# Altium PCB IObuffer.PcbDoc
Units mm, origin at the board's own origin, x right, y up, seen from the top; angles counter-clockwise.
Board outline 36 x 36 mm, 2 copper layers (Top Layer, Bottom Layer), stack 1.58 mm thick; 11 components, 16 nets, 64 pads, 11 vias.
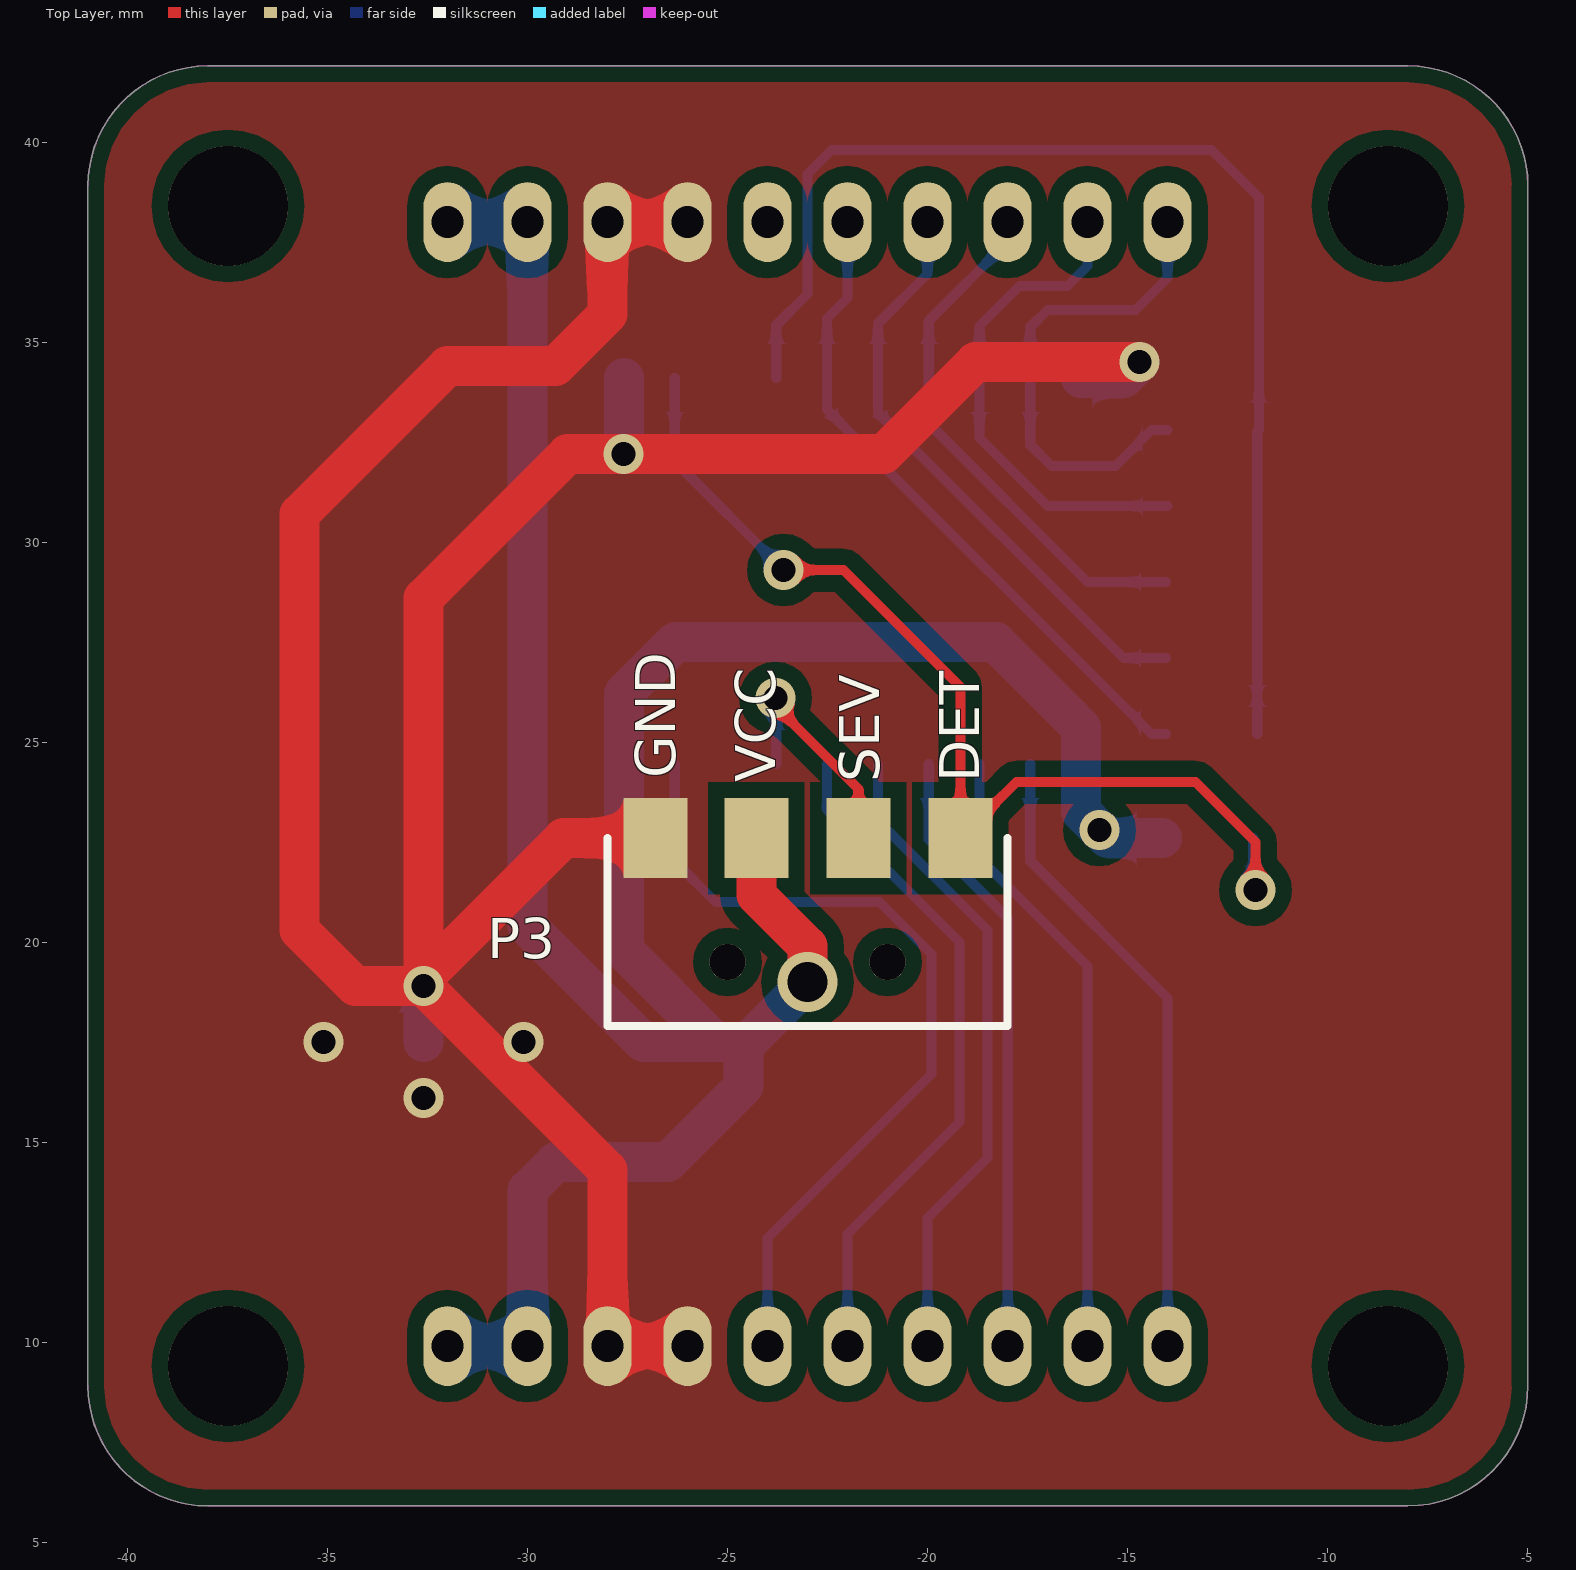
[diagram p0: Top Layer view]
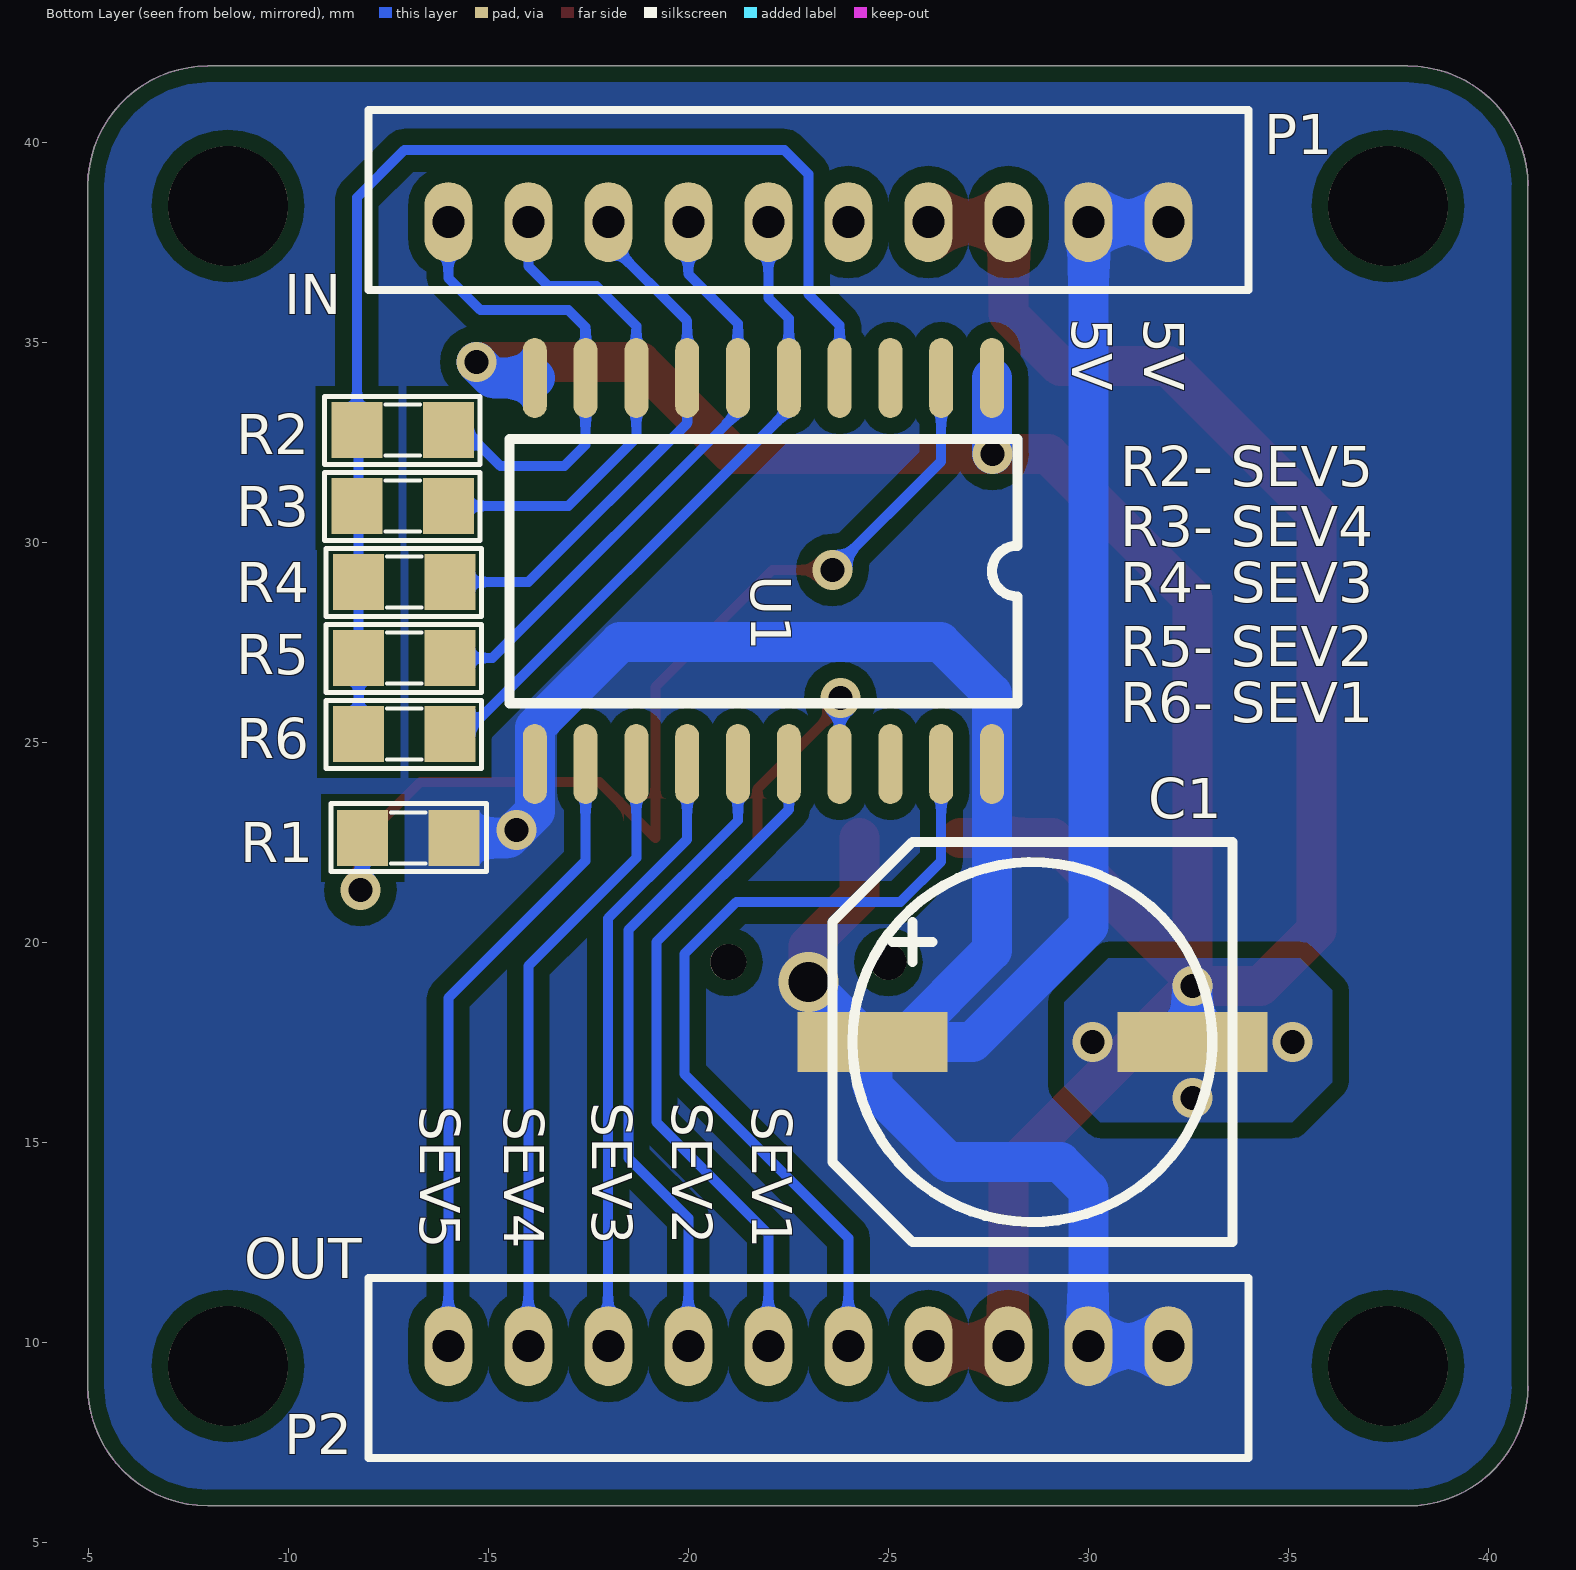
[diagram p1: Bottom Layer view, seen from below]
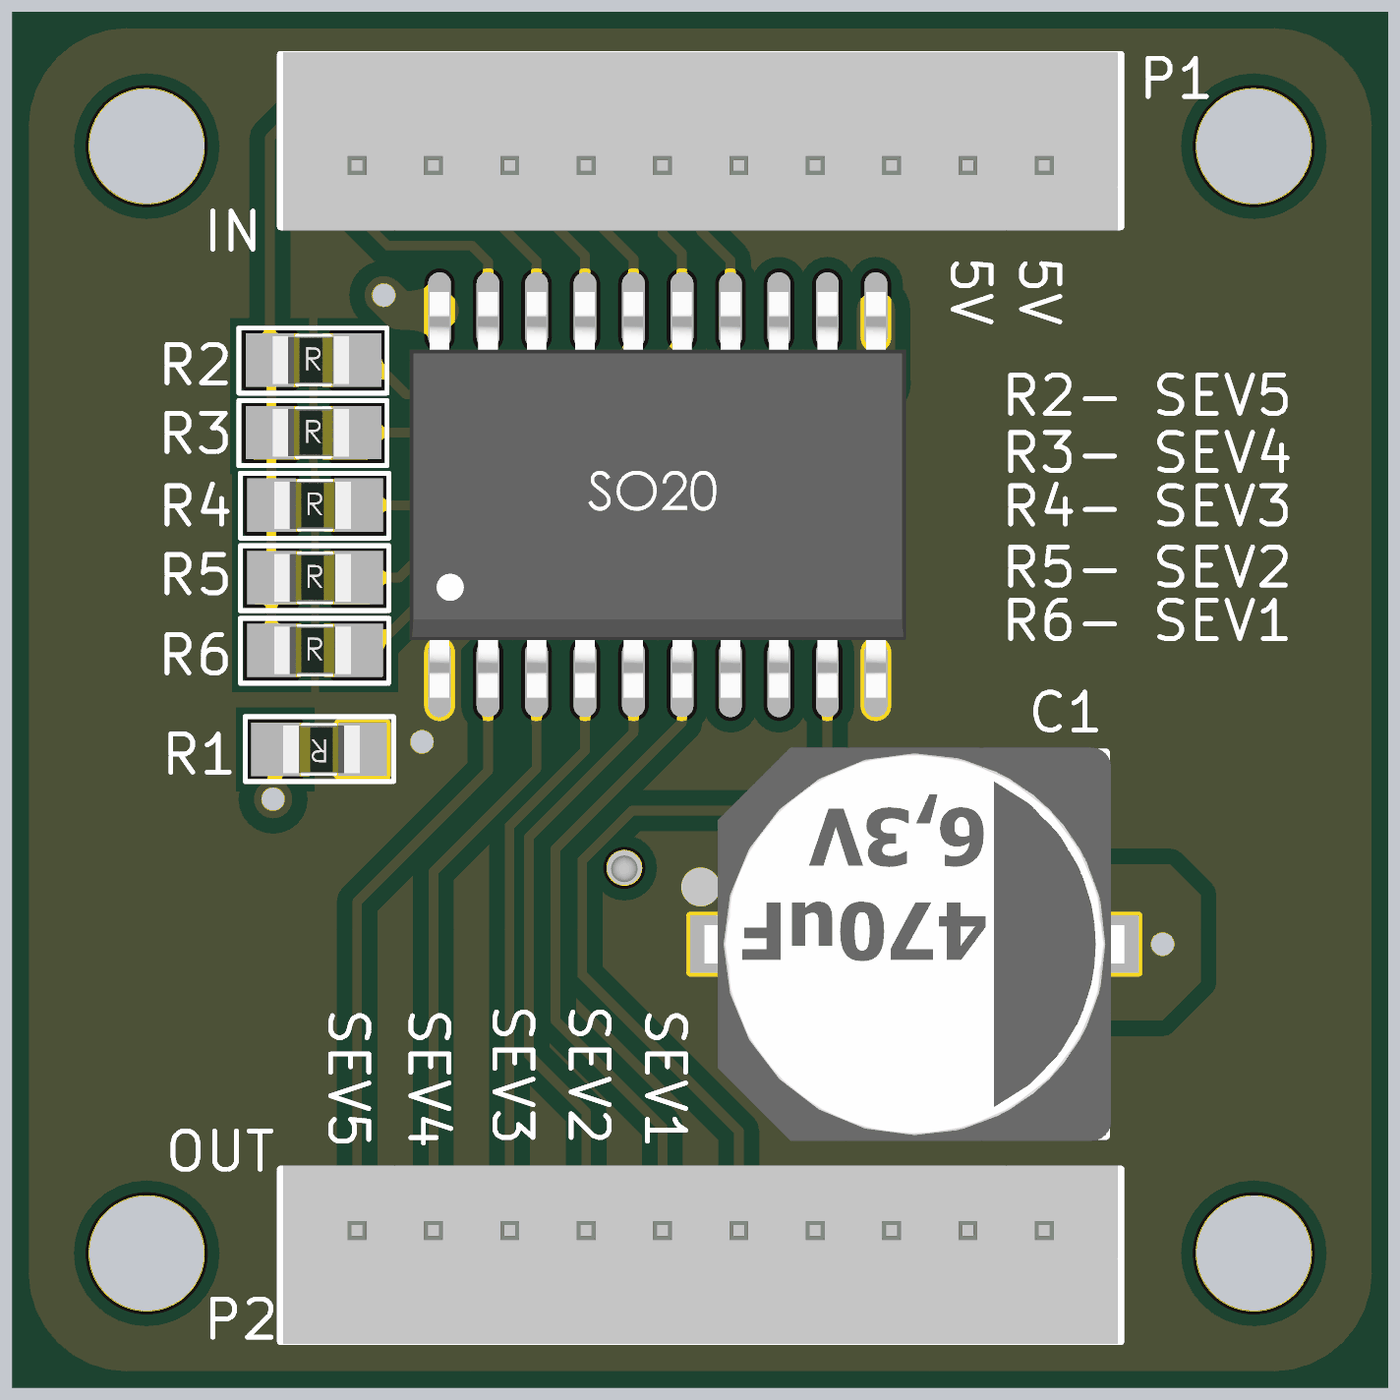
[diagram p2: 3D render of the assembled board from below, using the file's embedded part models]

## Layer stack, top to bottom
Top Solder: solder mask 0.0102, Solder Resist, Dk 3.5
Top Layer: signal copper 0.0356
Dielectric 1: dielectric 1.5086, FR-4, Dk 4.8
Bottom Layer: signal copper 0.0356
Bottom Solder: solder mask 0.0102, Solder Resist, Dk 3.5

## Board outline
-37.989,5.903 cw(c-37.989,8.903) -40.989,8.903 -40.989,38.903 cw(c-37.989,38.903) -37.989,41.903 -7.989,41.903 cw(c-7.989,38.903) -4.989,38.903 -4.989,8.903 cw(c-7.989,8.903) -7.989,5.903

## Design rules (kind name [scope] priority, off if disabled: settings)
Clearance [All] p1: gap=0.254
HoleSize [All] p1: absolutevalues=TRUE maxlimit=5 minlimit=0.01 maxpercent=80.000 minpercent=20.000
MinimumSolderMaskSliver [All] p1: minsoldermaskwidth=0.01
PolygonConnect [All] p1: connectstyle=Direct reliefconductorwidth=0.254 reliefentries=4 polygonreliefangle="90 Angle" airgapwidth=0.254
RoutingVias [All] p1: holewidth=0.3 width=0.6 viastyle="Through Hole" minholewidth=0.3 minwidth=0.6 maxholewidth=5 maxwidth=5
SilkToSilkClearance [All] p1: silktosilkclearance=0.1
SilkToSolderMaskClearance [IsPad] p1: minsilkscreentomaskgap=0.01 clearancetoexposedcopper=TRUE
SolderMaskExpansion [All] p1: expansion=0.102
Width [All] p1: maxlimit=5 minlimit=0.254 preferedwidth=0.254
26 further rules are at their usual default settings.

## Components (designator, comment, footprint, x,y, rotation, side; value= is the part's Value field where it differs from the comment)
C1 "1000uF" TU_NHOM_470uF_25V_MH -28.6,17.5 r270 bottom locked
P1 "IN" JST-PH2.00-10P -14,38 r180 bottom locked
P2 "OUT" JST-PH2.00-10P -32,9.9 r0 bottom locked
P3 "Header 4" SpringCON -23,19.5 r0 top locked
R1 "220" "Tro SMD 0805" -13,22.6 r0 bottom
R2 "0" "Tro SMD 0805" -12.857,32.8 r180 bottom
R3 "0" "Tro SMD 0805" -12.857,30.9 r180 bottom
R4 "0" "Tro SMD 0805" -12.9,29 r180 bottom
R5 "0" "Tro SMD 0805" -12.9,27.1 r180 bottom
R6 "0" "Tro SMD 0805" -12.9,25.2 r180 bottom
U1 "74HC573" SOIC-20 -21.875,29.274 r270 bottom locked

## Footprints (in the part's own frame and the unit in brackets; to place one, negate y for a bottom-side part, rotate by r counter-clockwise, add the part's x,y. Pads: shape width x height; smd on the part's side, far side on the other; paste and mask are expansions set on the pad)
JST-PH2.00-10P [mm]
  oval 1.2x2 hole 0.8 paste+0: 1(0,0) 2(2,0) 3(4,0) 4(6,0) 5(8,0) 6(10,0) 7(12,0) 8(14,0) 9(16,0) 10(18,0)
  silkscreen extent -2,-1.7 20,2.8, body extent -1.93,-1.8 19.93,2.87, height 5.89
SOIC-20 [mm]
  oval 2x0.6 smd: 1(-4.826,5.715) 2(-4.826,4.445) 3(-4.826,3.175) 4(-4.826,1.905) 5(-4.826,0.635) 6(-4.826,-0.635) 7(-4.826,-1.905) 8(-4.826,-3.175) 9(-4.826,-4.445) 10(-4.826,-5.715) 11(4.826,-5.715) 12(4.826,-4.445) 13(4.826,-3.175) 14(4.826,-1.905) 15(4.826,-0.635) 16(4.826,0.635) 17(4.826,1.905) 18(4.826,3.175) 19(4.826,4.445) 20(4.826,5.715)
  silkscreen extent -3.3,-6.35 3.3,6.35, body extent -5.31,-6.5 5.32,6.5, height 2.56
SpringCON [mm]
  rect 1.6x2 smd paste+0: 1(-3.8,3.1) 2(-1.275,3.1) 3(1.275,3.1) 4(3.825,3.1)
  round 0.9 hole 0.9 paste+0: NC(-2,0) NC(2,0)
  silkscreen extent -5,-1.6 5,3.1, body extent -5,-1.63 5,3.37, height 4.31
"Tro SMD 0805" [mil]
  rect 50x55 smd: 1(-45,0) 2(45,0)
  silkscreen extent -77,-34 76,33, body extent -62,-28 56,27, height 21
TU_NHOM_470uF_25V_MH [mm]
  rect 1.5x3.75 smd: 1(0,-4) 2(0,4)
  silkscreen extent -5,-5 5,5, body extent -5.15,-5.5 5.15,5.5, height 7.9

## Part data
C1: library part TU_NHOM_1000uF_16V_MH, "TU_NHOM_1000uF_16V_MH"
P1 P2: library part "Header 10", "Header, 10-Pin"
P3: "Header, 4-Pin"
R1 R2 R3 R4 R5 R6: library part "R nho", "RES, 100, 1%, 0.1 W, 0402"
U1: library part "74HC573 DIP20 IC Flip-Flop_MH", "Octal D-Type Latch with 3-State Output Non-Inverting"

## Free pads (board coordinates)
  round 3 hole 3 paste+0: NC(-37.489,9.403) NC(-37.489,38.403) NC(-8.489,9.403) NC(-8.489,38.403)

## Via types
v1: diameter 1, hole 0.6, Top Layer to Bottom Layer, tented both sides, 10 vias
v2: diameter 1.5, hole 1, Top Layer to Bottom Layer, tented both sides, 1 vias

## Nets (pads, with @x,y where several pads share a name; then routed paths per layer and width w, separated by ;. In a path a pad name is that pad's centre, name@x,y a point inside that pad or via, vN(x,y) a via of type N, cw(c..) or ccw(c..) an arc to the next point about the centre after c; other vN are vias at no path point)
5V: C1.1 P1.9 P1.10 P2.1 P2.2 P3.2 R1.1 U1.11 U1.20 | length 73.6
  Top Layer w1: P3.2 -24.275,21.175 -23,19.9 v2(-23,19)
  Bottom Layer w1: P2.1 P2.2 -30,13.8 -29.3,14.5 -26.5,14.5 -24.6,16.4 C1.1 ; P1.10 P1.9 -30,20.4 -27.1,17.5 C1.1 ; v2(-23,19) -24.5,17.5 C1.1 ; R1.1 -15.5,22.6 v1(-15.7,22.8) -16.16,23.26 U1.11 -16.16,25.36 -16.376,25.576 -16.376,25.585 -18.291,27.5 -26.304,27.5 -27.59,26.214 U1.20 -27.59,19.79 -25.3,17.5 C1.1
DET: P3.4 R1.2 U1.2 | length 26.4
  Top Layer w0.254: v1(-23.6,29.3) -22.1,29.3 -19.175,26.375 P3.4 -17.775,24 -13.3,24 -11.8,22.5 v1(-11.8,21.3)
  Bottom Layer w0.254: U1.2 -26.32,32.02 v1(-23.6,29.3) ; R1.2 -11.857,21.357 v1(-11.8,21.3)
DETS: P2.5 U1.19 | length 21.3
  Bottom Layer w0.254: U1.19 -26.32,22.02 -25.3,21 -21.2,21 -19.9,19.7 -19.9,16.7 -24,12.6 P2.5
GND: C1.2 P1.7 P1.8 P2.3 P2.4 P3.1 U1.1 U1.10 | length 83.3
  Top Layer w1: P3.1 -29.1,22.6 v1@-32.6,19.1 ; P2.4 P2.3 -28,14.3 v1(-32.6,18.9) ; P1.7 P1.8 -28,35.7 -29.3,34.4 -32,34.4 -35.7,30.7 -35.7,20.3 -34.3,18.9 v1(-32.6,18.9) ; v1(-14.7,34.5) -18.8,34.5 -21.1,32.2 v1(-27.6,32.2) -29,32.2 -32.6,28.6 v1@-32.6,19.1 ; v1(-32.6,18.9) v1@-32.6,19.1
  Bottom Layer w1: C1.2 v1(-32.6,18.9) ; v1(-27.6,32.2) -27.59,32.21 U1.1 ; U1.10 -15.1,34.1 v1(-14.7,34.5)
  other v1: -32.6,16.1 -35.1,17.5 -30.1,17.5
SER1: P2.6 U1.16 | length 17.1
  Bottom Layer w0.254: U1.16 -22.51,23.31 -19.2,20 -19.2,15.5 -22,12.7 P2.6
SER2: P2.7 U1.15 | length 16.3
  Bottom Layer w0.254: U1.15 -21.24,23.04 -18.5,20.3 -18.5,14.6 -20,13.1 P2.7
SER3: P2.8 U1.14 | length 15.4
  Bottom Layer w0.254: U1.14 -19.97,22.57 -17.992,20.592 -17.992,9.908 P2.8
SER4: P2.9 U1.13 | length 15.7
  Bottom Layer w0.254: U1.13 -18.7,22.1 -16,19.4 P2.9
SER5: P2.10 U1.12 | length 16
  Bottom Layer w0.254: U1.12 -17.43,22.03 -14,18.6 P2.10
SERS1: P1.5 R6.2 U1.5 | length 16.7
  Bottom Layer w0.254: P1.5 -22,36.1 -22.51,35.59 U1.5 -22.51,33.31 -14.4,25.2 R6.2
SERS2: P1.4 R5.2 U1.6 | length 15
  Bottom Layer w0.254: P1.4 -20,36.7 -21.24,35.46 U1.6 -21.24,33.24 -15.1,27.1 R5.2
SERS3: P1.3 R4.2 U1.7 | length 13.4
  Bottom Layer w0.254: P1.3 -18,37.5 -19.97,35.53 U1.7 -19.97,32.97 -16,29 R4.2
SERS4: P1.2 R3.2 U1.8 | length 12.6
  Bottom Layer w0.254: P1.2 -16,36.9 -16.5,36.4 -17.7,36.4 -18.7,35.4 U1.8 -18.7,32.6 -17,30.9 R3.2
SERS5: P1.1 R2.2 U1.9 | length 12.3
  Bottom Layer w0.254: R2.2 -14.4,32.8 -15.3,31.9 -16.9,31.9 -17.43,32.43 U1.9 -17.43,35.37 -17,35.8 -14.8,35.8 -14,36.6 P1.1
SERVO_C: P3.3 U1.17 | length 6
  Top Layer w0.254: v1(-23.8,26.1) -23.8,25.9 -21.725,23.825 P3.3
  Bottom Layer w0.254: v1(-23.8,26.1) -23.78,26.08 U1.17
SEV1: R2.1 R3.1 R4.1 R5.1 R6.1 U1.4 | length 30.9
  Bottom Layer w0.254: U1.4 -23.78,35.42 -23,36.2 -23,39.2 -22.4,39.8 -12.9,39.8 -11.714,38.614 R2.1 -11.757,32.757 R5.1 R6.1
pads on no net: P1.6 P3.NC U1.3 U1.18

## Polygon pours and split planes (outlines as drawn)
GND on Top Layer "Bottom Layer-No Net" (solid, pour order 5): -26.5,41.903 -26.514,41.889 -38.224,41.889 -40.117,41.031 -40.989,39.125 -40.989,38.2 -40.989,8.677 -40.117,6.775 -38.224,5.912 -7.754,5.912 -5.861,6.775 -4.998,8.668 -4.998,39.298 -5.861,41.031 -7.6,41.9
5V on Bottom Layer "Bottom Layer-No Net" (solid, pour order 4): -26.5,41.903 -26.514,41.889 -38.224,41.889 -40.117,41.031 -40.989,39.125 -40.989,38.2 -40.989,8.677 -40.117,6.775 -38.224,5.912 -7.754,5.912 -5.861,6.775 -4.998,8.668 -4.998,39.298 -5.861,41.031 -7.6,41.9
GND on Bottom Layer "Bottom Layer-No Net" (solid, pour order 6): -32,19.6 -35.3,19.6 -35.8,19.1 -36.1,18.8 -36.1,17.7 -36.1,16.5 -35.1,15.5 -32.2,15.5 -30.3,15.5 -29.6,16.2 -29.4,16.4 -29.4,18.5 -30.5,19.6

## Keep-outs
Keep-Out Layer:
  the board outline again, w0.013

## Silkscreen, mask and mechanical layers (free items; w line width, h text height)
Top Overlay:
  text "GND" at -26.3,24.1 h1 r90
  text "VCC" at -23.8,24 h1 r90
  text "SEV" at -21.2,24 h1 r90
  text "DET" at -18.7,24 h1 r90
Bottom Overlay:
  text "IN" at -9.9,35.7 h1
  text "5V" at -31.4,35.6 h1 r90
  text "5V" at -29.6,35.6 h1 r90
  text "R2- SEV5" at -30.8,31.4 h1
  text "R3- SEV4" at -30.8,29.9 h1
  text "R4- SEV3" at -30.8,28.5 h1
  text "R5- SEV2" at -30.8,26.9 h1
  text "R6- SEV1" at -30.8,25.5 h1
  text "SEV2" at -19.6,16 h1 r90
  text "SEV3" at -17.6,16 h1 r90
  text "SEV1" at -21.6,15.9 h1 r90
  text "SEV4" at -15.4,15.9 h1 r90
  text "SEV5" at -13.3,15.9 h1 r90
  text "OUT" at -8.9,11.6 h1
Mechanical 3:
  circle w0.013: c-20.998,19.507 r0.45
  circle w0.013: c-24.998,19.507 r0.45
  circle w0.013: c-37.498,38.407 r1.5
  circle w0.013: c-37.498,9.407 r1.5
  circle w0.013: c-8.498,9.407 r1.5
  circle w0.013: c-8.498,38.407 r1.5
  circle w0.013: c-37.489,9.403 r1.5
  circle w0.013: c-24.989,19.503 r0.45
  circle w0.013: c-20.989,19.503 r0.45
  circle w0.013: c-8.489,38.403 r1.5
  circle w0.013: c-8.489,9.403 r1.5
  circle w0.013: c-37.489,38.403 r1.5
  lines w0.013: -40.998,8.907 ccw(c-37.998,8.907) -37.998,5.907 -7.998,5.907 ccw(c-7.998,8.907) -4.998,8.907 -4.998,38.907 ccw(c-7.998,38.907) -7.998,41.907 -37.998,41.907 ccw(c-37.998,38.907) -40.998,38.907 -40.998,8.907 ; -40.998,16.407 -40.998,31.407 -36.998,31.407 -36.998,16.407 -40.998,16.407 ; -33.998,6.907 -11.998,6.907 -11.998,11.707 -33.998,11.707 -33.998,6.907 ; -33.998,36.107 -11.998,36.107 -11.998,40.907 -33.998,40.907 -33.998,36.107 ; -27.989,17.903 -27.989,22.603 -17.989,22.603 -17.989,17.903 -27.989,17.903 ; -27.549,21.703 -27.549,23.503 -26.049,23.503 -26.049,21.703 -27.549,21.703 ; -25.009,21.703 -25.009,23.503 -23.509,23.503 -23.509,21.703 -25.009,21.703 ; -22.469,21.703 -22.469,23.503 -20.969,23.503 -20.969,21.703 -22.469,21.703 ; -19.929,21.703 -19.929,23.503 -18.429,23.503 -18.429,21.703 -19.929,21.703 ; -8.998,16.407 -8.998,31.407 -4.998,31.407 -4.998,16.407 -8.998,16.407